# Altium PCB PCB.PcbDoc
Units mm, origin at the board's own origin, x right, y up, seen from the top; angles counter-clockwise.
Board outline 56 x 87.1 mm, 2 copper layers (Top Layer, Bottom Layer); 120 components, 78 nets, 367 pads, 158 vias.
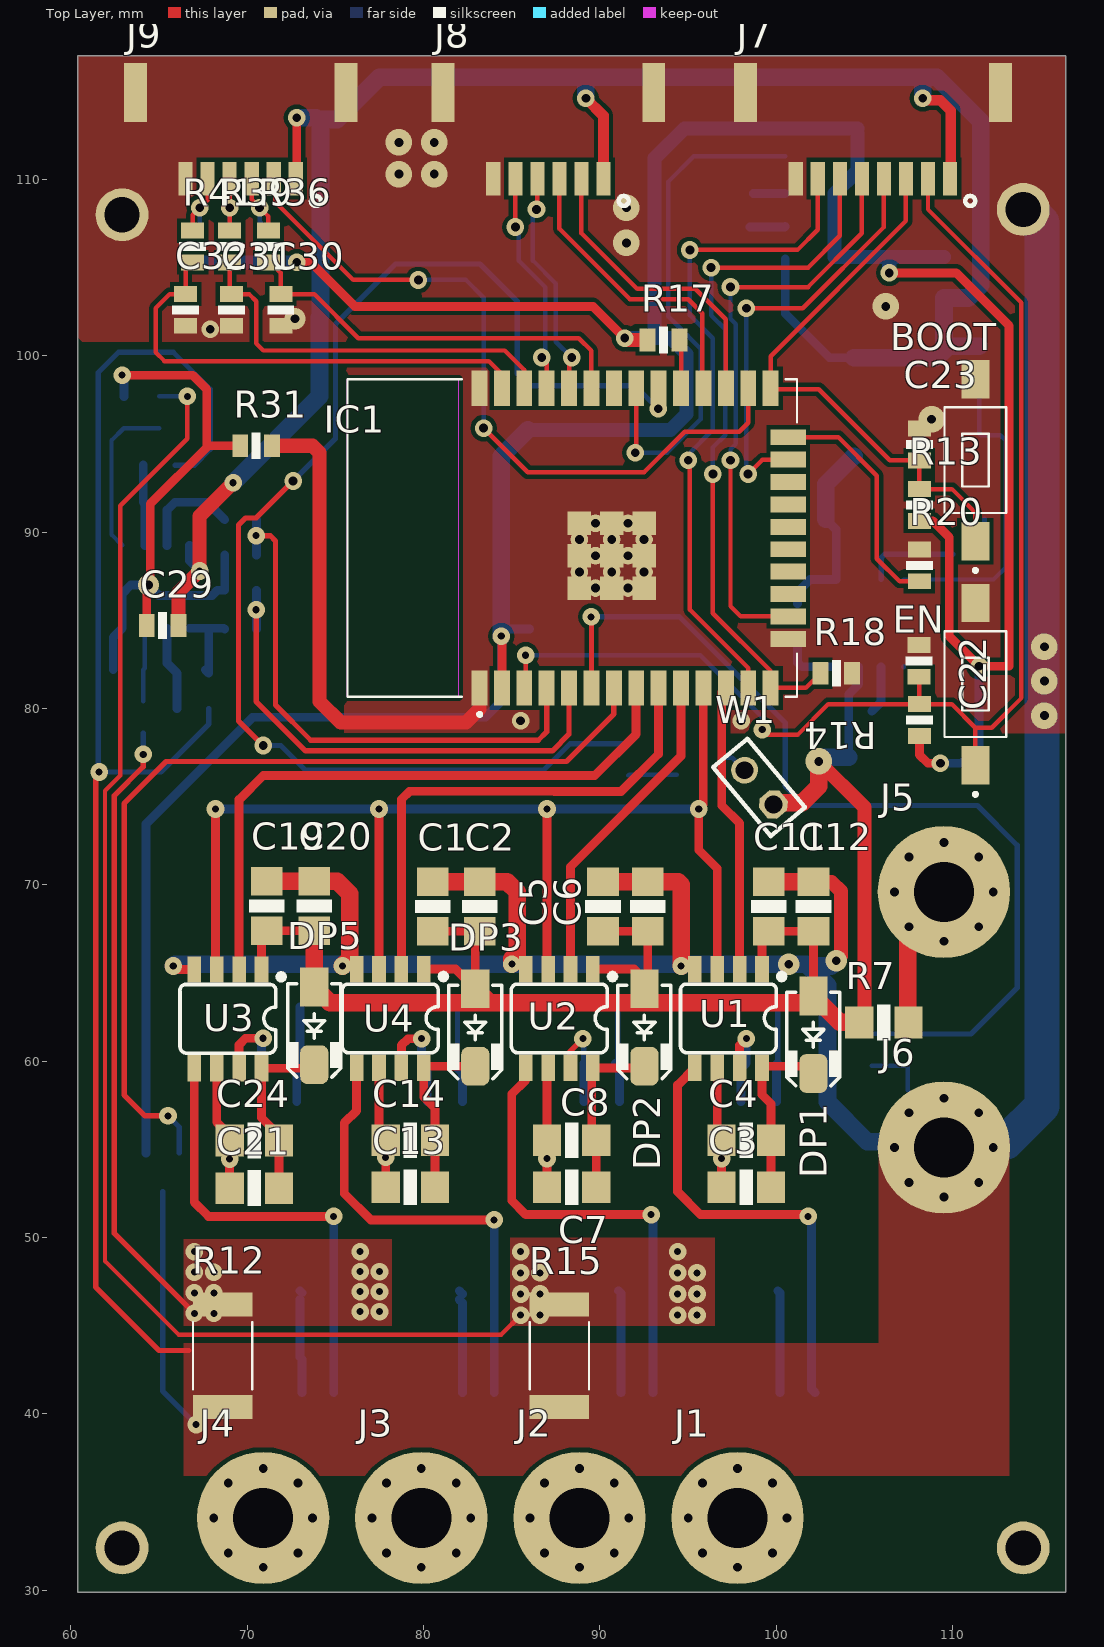
[diagram p0: Top Layer view]
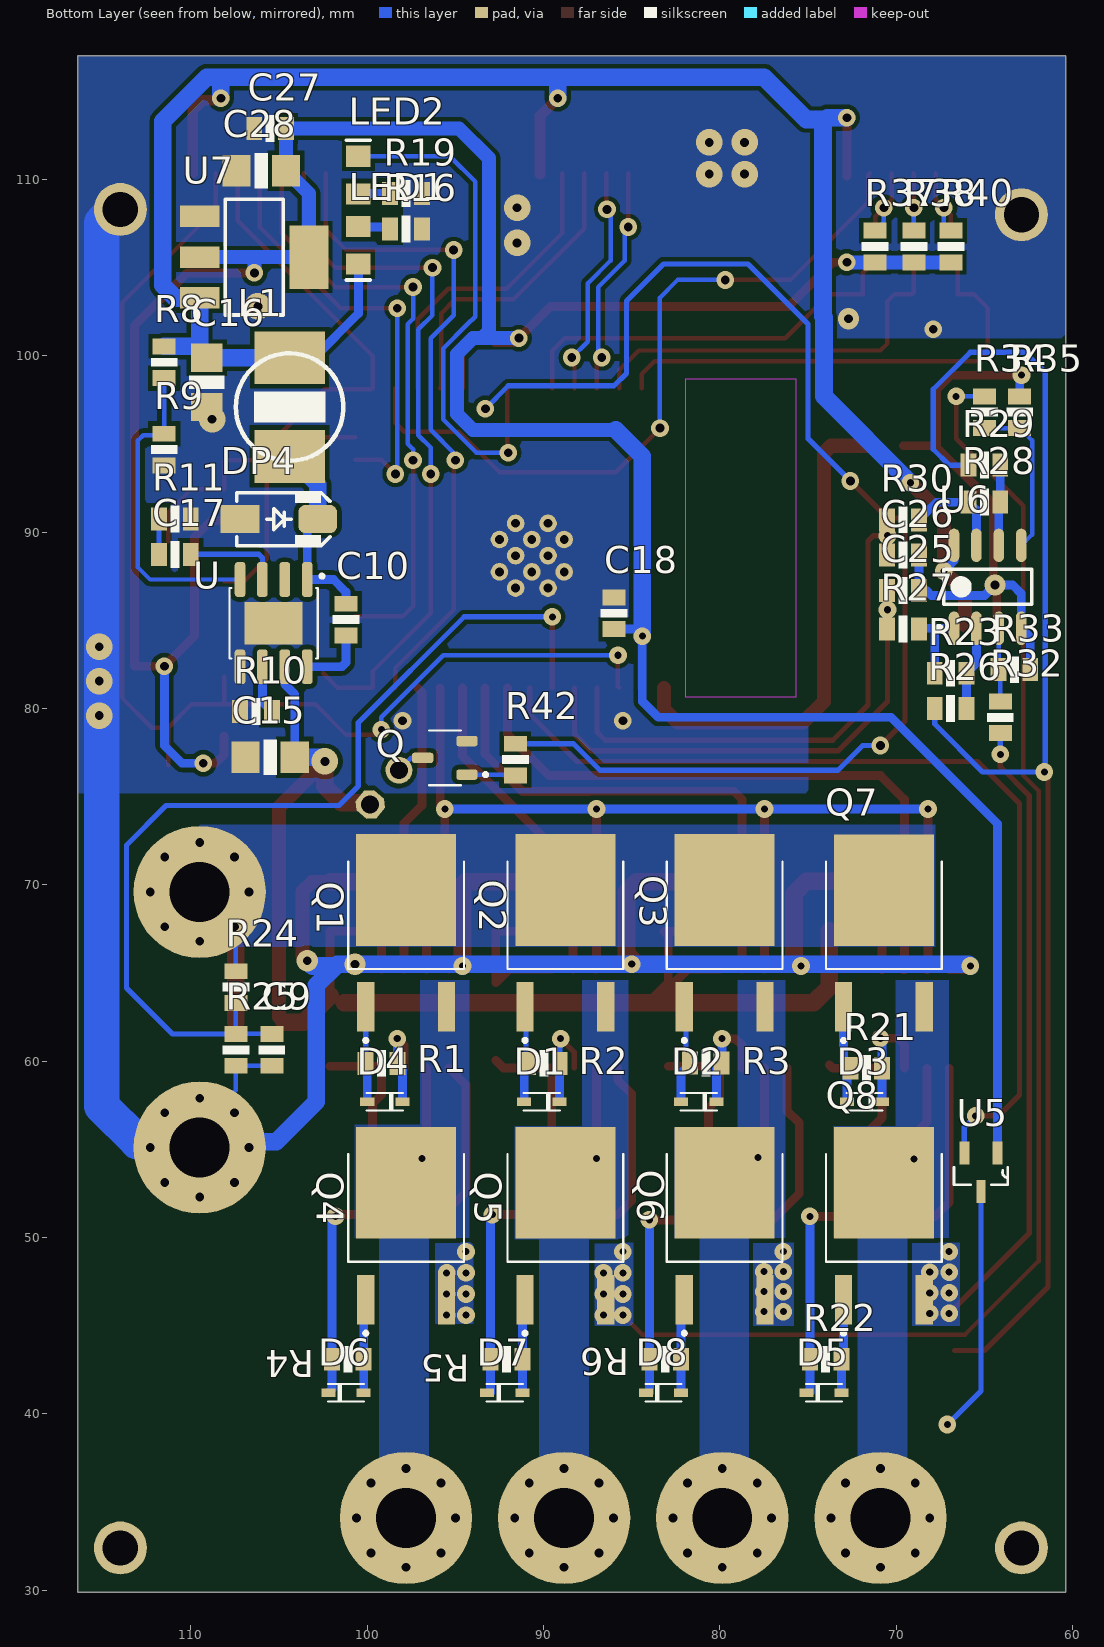
[diagram p1: Bottom Layer view, seen from below]

## Layer stack, top to bottom
Top Solder: solder mask 0.0102, Solder Resist, Dk 3.5
Top Layer: signal copper 0.0356
Dielectric 1: dielectric 0.32, FR-4, Dk 4.8
Bottom Layer: signal copper 0.0356
Bottom Solder: solder mask 0.0102, Solder Resist, Dk 3.5

## Board outline
60.4,29.9 60.4,117 116.4,117 116.4,29.9

## Design rules (kind name [scope] priority, off if disabled: settings)
Clearance [All] p1: gap=0.254 ignorepadtopadclearanceinfootprint=FALSE except(0: Arc-Hole Track-Hole SMDPad-Hole THPad-Hole Via-Hole Fill-Hole Poly-Hole Region-Hole Text-Hole)
PolygonConnect [All] p1: connectstyle=Direct reliefconductorwidth=0.254 reliefentries=4 polygonreliefangle="90 Angle" airgapwidth=0.254
RoutingVias [All] p1: holewidth=0.711 width=1.27 viastyle="Through Hole" minholewidth=0.711 minwidth=1.27 maxholewidth=0.711 maxwidth=1.27
SolderMaskExpansion [All] p1: expansion=0.102
Width [All] p1: maxlimit=4 minlimit=0.254 preferedwidth=0.3
30 further rules are at their usual default settings.

## Classes and differential pairs
component class power: C1 C2 C3 C4 C5 C6 C7 C8 C10 C11 C12 C13 C14 C15 C16 C17 C19 C20 C21 C24 C25 C26 C27 C28 C29 C? D1 D2 D3 D4 D5 D6 D7 D8 DP1 DP2 DP3 DP4 DP5 J1 J2 J3 J4 J5 J6 L1 LED1 Q1 Q2 Q3 Q4 Q5 Q6 Q7 Q8 Q? R1 R2 R3 R4 R5 R6 R7 R8 R9 R10 R11 R12 R15 R16 R21 R22 R23 R26 R27 R28 R29 R30 R31 R32 R33 R34 R35 R? U U1 U2 U3 U4 U6 U7 UP?
component class mcu: BOOT BOOT? C9 C18 C22 C23 C30 C31 C32 EN EN? IC1 IC? J J7 J8 J9 J10 J11 LED2 Q R13 R14 R17 R18 R19 R20 R24 R25 R36 R37 R38 R39 R40 R41 R42 R? U5 W1

## Components (designator, comment, footprint, x,y, rotation, side; value= is the part's Value field where it differs from the comment)
BOOT "1437566-4" SW_1437566-4 111.288,94.082 r90 top
C1 "Cap" _1206 80.518,68.77 r90 top value=100nF
C2 "Cap" _1206 83.185,68.77 r90 top value=10uF
C3 "Cap" _1206 98.298,52.85 r180 top value=100nF
C4 "Cap" _1206 98.298,55.517 r180 top value=10uF
C5 "Cap" _1206 90.17,68.77 r90 top value=100nF
C6 "Cap" _1206 92.71,68.77 r90 top value=10uF
C7 "Cap" _1206 88.392,52.85 r180 top value=100nF
C8 "Cap" _1206 88.392,55.517 r180 top value=10uF
C9 "Cap" _0805 105.41,60.642 r270 bottom value=100nF
C10 "Cap" _0805 101.207,85.039 r90 bottom value=100nF
C11 "Cap" _1206 99.568,68.77 r90 top value=100nF
C12 "Cap" _1206 102.108,68.77 r90 top value=10uF
C13 "Cap" _1206 79.248,52.85 r180 top value=100nF
C14 "Cap" _1206 79.248,55.517 r180 top value=10uF
C15 "Cap" _1206 105.506,77.239 r0 bottom value=10uF
C16 "Cap" _1206 109.099,98.491 r270 bottom value=10uF
C17 "Cap" _0805 110.906,88.739 r0 bottom value=150pF
C18 "Cap" _0805 86,85.4 r90 bottom value=100nF
C19 "Cap" _1206 71.1,68.8 r90 top value=100nF
C20 "Cap" _1206 73.8,68.8 r90 top value=10uF
C21 "Cap" _1206 70.4,52.8 r180 top value=100nF
C22 "Cap" _0805 108.1,82.7 r90 top value=100nF
C23 "Cap" _0805 108.113,94.971 r90 top value=100nF
C24 "Cap" _1206 70.4,55.5 r180 top value=10uF
C25 "Cap" _0805 69.619,86.7 r180 bottom value=150pF
C26 "Cap" _0805 69.619,88.7 r180 bottom value=150pF
C27 "Cap" _0805 105.506,112.891 r180 bottom value=100nF
C28 "Cap" _1206 106.007,110.491 r0 bottom value=10uF
C29 "Cap" _0805 65.2,84.7 r0 top value=100nF
C30 "Cap" _0805 71.9,102.6 r270 top value=100pF
C31 "Cap" _0805 69.1,102.6 r270 top value=100pF
C32 "Cap" _0805 66.5,102.6 r270 top value=100pF
D1 "1N4148W" SOD523F 90.1,57.7 r180 bottom
D2 "1N4148W" SOD523F 81.2,57.7 r180 bottom
D3 "1N4148W" SOD523F 71.8,57.7 r180 bottom
D4 "1N4148W" SOD523F 99,57.7 r180 bottom
D5 "1N4148W" SOD523F 74.1,41.2 r0 bottom
D6 "1N4148W" SOD523F 101.2,41.2 r0 bottom
D7 "1N4148W" SOD523F 92.2,41.2 r0 bottom
D8 "1N4148W" SOD523F 83.2,41.2 r0 bottom
DP1 "1N5819" 430X270D 102.1,61.5 r270 top
DP2 "1N5819" 430X270D 92.519,61.912 r270 top
DP3 "1N5819" 430X270D 82.931,61.912 r270 top
DP4 "1N5819" 430X270D 105.007,90.739 r180 bottom
DP5 "1N5819" 430X270D 73.8,62 r270 top
EN "1437566-4" SW_1437566-4 111.288,81.382 r90 top
IC1 "ESP32-WROOM-32" MODULE_ESP32-WROOM-32 88.425,89.665 r90 top
J1 "" "M3 Spade Hole" 97.8,34.1 r0 top
J2 "" "M3 Spade Hole" 88.833,34.1 r0 top
J3 "" "M3 Spade Hole" 79.867,34.1 r0 top
J4 "" "M3 Spade Hole" 70.9,34.1 r0 top
J5 "" "M3 Spade Hole" 109.5,69.6 r0 top
J6 "" "M3 Spade Hole" 109.5,55.1 r0 top
J7 "I2C/SPI" JST_FH_8P 109.85,110.05 r180 top
J8 "UART" JST_FH_6P 90.2,110.05 r180 top
J9 "HALL/ENCODER" JST_FH_6P 72.75,110.05 r180 top
L1 "Inductor" _INDUCTOR-SMD-6.0mm 104.4,97.094 r90 bottom value=10uH
LED1 "LED" _LED-0805 100.5,106.319 r270 bottom
LED2 "LED" _LED-0805 100.5,110.2 r90 bottom
Q "AO3400A" SOT95P280X125-3N 95.6,77.2 r0 bottom
Q1 "FILL_FOOTPRINT" TO229P994X240-3N 97.791,67.276 r90 bottom
Q2 "FILL_FOOTPRINT" TO229P994X240-3N 88.761,67.276 r90 bottom
Q3 "FILL_FOOTPRINT" TO229P994X240-3N 79.73,67.276 r90 bottom
Q4 "FILL_FOOTPRINT" TO229P994X240-3N 97.791,50.669 r90 bottom
Q5 "FILL_FOOTPRINT" TO229P994X240-3N 88.761,50.669 r90 bottom
Q6 "FILL_FOOTPRINT" TO229P994X240-3N 79.73,50.669 r90 bottom
Q7 "FILL_FOOTPRINT" TO229P994X240-3N 70.7,67.27 r90 bottom
Q8 "FILL_FOOTPRINT" TO229P994X240-3N 70.7,50.67 r90 bottom
R1 "Resistor" _0805 99.187,59.88 r180 bottom value=10R
R2 "Resistor" _0805 89.98,59.88 r180 bottom value=10R
R3 "Resistor" _0805 80.8,59.9 r180 bottom value=10R
R4 "Resistor" _0805 101.1,43.1 r0 bottom value=10R
R5 "Resistor" _0805 92.1,43.1 r0 bottom value=10R
R6 "Resistor" _0805 83.1,43.1 r0 bottom value=10R
R7 "Resistor" _1206 106.1,62.2 r180 top value=0
R8 "Resistor" _0805 111.512,99.634 r90 bottom value=100K
R9 "Resistor" _0805 111.512,94.681 r90 bottom value=100K
R10 "Resistor" _0805 106.307,79.839 r180 bottom value=100K
R11 "Resistor" _0805 110.906,90.739 r0 bottom value=100K
R12 "500u" RESC6332X64N 68.6,43.3 r90 top
R13 "Resistor" _0805 108.113,91.542 r270 top value=4.7K
R14 "Resistor" _0805 108.113,79.35 r270 top value=4.7K
R15 "500u" RESC6332X64N 87.7,43.3 r90 top
R16 "Resistor" _0805 97.8,107.2 r180 bottom value=220
R17 "Resistor" _0805 93.6,100.9 r180 top value=4.7K
R18 "Resistor" _0805 103.4,82 r180 top value=4.7K
R19 "Resistor" _0805 97.8,109.2 r180 bottom value=220
R20 "Resistor" _0805 108.113,88.113 r90 top value=4.7K
R21 "Resistor" _0805 71.7,59.6 r180 bottom value=10R
R22 "Resistor" _0805 74,43.1 r0 bottom value=10R
R23 "Resistor" _0805 66.919,82 r180 bottom value=100K
R24 "Resistor" _0805 107.442,64.198 r90 bottom value=4.7K
R25 "Resistor" _0805 107.442,60.642 r90 bottom value=4.7K
R26 "Resistor" _0805 66.919,80 r0 bottom value=100K
R27 "Resistor" _0805 69.619,84.5 r180 bottom value=100K
R28 "Resistor" _0805 65,91.7 r180 bottom value=100K
R29 "Resistor" _0805 65,93.8 r0 bottom value=100K
R30 "Resistor" _0805 69.619,90.7 r180 bottom value=100K
R31 "Resistor" _0805 70.5,94.9 r180 top value=0
R32 "Resistor" _0805 64.1,79.5 r270 bottom value=100K
R33 "Resistor" _0805 63.3,82.2 r180 bottom value=100K
R34 "Resistor" _0805 65,96.8 r90 bottom value=100K
R35 "Resistor" _0805 63,96.8 r90 bottom value=100K
R36 "Resistor" _0805 71.2,106.2 r90 top value=1K
R37 "Resistor" _0805 71.2,106.2 r270 bottom value=4.7K
R38 "Resistor" _0805 69,106.2 r90 bottom value=4.7K
R39 "Resistor" _0805 69,106.2 r90 top value=1K
R40 "Resistor" _0805 66.9,106.2 r90 bottom value=4.7K
R41 "Resistor" _0805 66.9,106.2 r90 top value=1K
R42 "Resistor" _0805 91.6,77.1 r90 bottom value=1K
U "MP1584EN" SOIC127P600X170-9N 105.307,84.839 r270 bottom
U1 "IR2104" _SO08 97.282,62.42 r180 top
U2 "IR2104" _SO08 87.694,62.42 r180 top
U3 "IR2104" _SO08 68.9,62.4 r180 top
U4 "IR2104" _SO08 78.105,62.42 r180 top
U5 "MCP9700T-E/TT" SOT95P237X112-3N 65.2,53.7 r270 bottom
U6 "LM358D" D008_L 64.819,86.9 r90 bottom
U7 "3.3V" _SOT223 106.407,105.592 r270 bottom
W1 "Jumper" My_IDC-2 94.775,70.327 r40 top

## Footprints (in the part's own frame and the unit in brackets; to place one, negate y for a bottom-side part, rotate by r counter-clockwise, add the part's x,y. Pads: shape width x height; smd on the part's side, far side on the other; paste and mask are expansions set on the pad)
430X270D [mm] "SMA Molded Diode, 2-Leads, Body 4.3x2.7mm"
  rect 2.2x1.6 smd: 1(-2.2,0)
  rrect50% 2.2x1.6 smd: 2(2.2,0)
  silkscreen extent -2.4,-1.5 2.9,1.5, body extent -2.75,-1.4 2.75,1.4, height 2.6
_0805 [mm]
  rect 0.9x1.3 smd: 1(-0.9,0) 2(0.9,0)
  silkscreen extent -0.25,-0.76 0.25,0.76
_1206 [mm]
  rect 1.6x1.8 smd: 1(-1.4,0) 2(1.4,0)
  silkscreen extent -0.38,-1.02 0.38,1.02
_INDUCTOR-SMD-6.0mm [mm]
  rect 3x4 smd: 1(-2.794,0) 2(2.794,0)
  silkscreen extent -3.05,-3.05 3.05,3.05
_LED-0805 [mil]
  rect 47.24x55.12 smd: A(-40,0) K(44.06,0)
  silkscreen extent 79,-27 79,27
_SO08 [mm]
  rect 0.77x1.5 smd: 1(-1.905,-2.8) 2(-0.635,-2.8) 3(0.635,-2.8) 4(1.905,-2.8) 5(1.905,2.8) 6(0.635,2.8) 7(-0.635,2.8) 8(-1.905,2.8)
  silkscreen extent -3.33,-2.7 2.72,1.95
_SOT223 [mil]
  rect 48x88 smd: 1(-91,-122) 2(0,-122) 3(91,-122)
  rect 141.73x86.61 smd: 4(0,122.01)
  silkscreen extent -129,-65 129,65
D008_L [mm] "SOIC, 8-Leads, Body 4.9x3.9mm, Pitch 1.27mm, IPC High Density"
  oval 1.9x0.6 smd: 1(-2.35,1.905) 2(-2.35,0.635) 3(-2.35,-0.635) 4(-2.35,-1.905) 5(2.35,-1.905) 6(2.35,-0.635) 7(2.35,0.635) 8(2.35,1.905)
  silkscreen extent -2.47,-2.5 1,2.88, body extent -2,-2.5 2,2.5, height 1.75
JST_FH_6P [mm]
  rect 0.8x1.6 smd: 1(0,0)
  rect 0.8x1.9 smd: 1(0,0) 2(1.25,0) 3(2.5,0) 4(3.75,0) 5(5,0) 6(6.25,0)
  rect 1.3x3.35 smd: b1(-2.85,-4.875) b2(9.1,-4.875)
  silkscreen extent -1.43,0.99 -0.86,1.55
JST_FH_8P [mm]
  rect 0.8x1.9 smd: 1(0,0) 2(1.25,0) 3(2.5,0) 4(3.75,0) 5(5,0) 6(6.25,0) 7(7.5,0) 8(8.75,0)
  rect 0.8x1.6 smd: 1(0,0)
  rect 1.3x3.35 smd: b1(-2.85,-4.875) b2(11.6,-4.875)
  silkscreen extent -1.43,0.99 -0.86,1.55
"M3 Spade Hole" [mm]
  round 7.5 hole 3.4: 1(0,0)
MODULE_ESP32-WROOM-32 [mm]
  rect 2x0.9 smd: 1(-8.5,5.26) 2(-8.5,3.99) 3(-8.5,2.72) 4(-8.5,1.45) 5(-8.5,0.18) 6(-8.5,-1.09) 7(-8.5,-2.36) 8(-8.5,-3.63) 9(-8.5,-4.9) 10(-8.5,-6.17) 11(-8.5,-7.44) 12(-8.5,-8.71) 13(-8.5,-9.98) 14(-8.5,-11.25) 25(8.5,-11.25) 26(8.5,-9.98) 27(8.5,-8.71) 28(8.5,-7.44) 29(8.5,-6.17) 30(8.5,-4.9) 31(8.5,-3.63) 32(8.5,-2.36) 33(8.5,-1.09) 34(8.5,0.18) 35(8.5,1.45) 36(8.5,2.72) 37(8.5,3.99) 38(8.5,5.26)
  rect 0.9x2 smd: 15(-5.715,-12.25) 16(-4.445,-12.25) 17(-3.175,-12.25) 18(-1.905,-12.25) 19(-0.635,-12.25) 20(0.635,-12.25) 21(1.905,-12.25) 22(3.175,-12.25) 23(4.445,-12.25) 24(5.715,-12.25)
  rect 1.33x1.33 smd: 39_1(-2.835,-0.405) 39_2(-1,-0.405) 39_3(0.835,-0.405) 39_4(-2.835,-2.24) 39_5(-1,-2.24) 39_6(0.835,-2.24) 39_7(-2.835,-4.075) 39_8(-1,-4.075) 39_9(0.835,-4.075)
  round 1 hole 0.5: 39_10(-1.917,-0.405) 39_11(-0.082,-0.405) 39_12(-2.835,-1.322) 39_13(-1,-1.322) 39_14(0.835,-1.322) 39_15(-1.917,-2.24) 39_16(-0.082,-2.24) 39_17(-2.835,-3.157) 39_18(-1,-3.157) 39_19(0.835,-3.157) 39_20(-1.917,-4.075) 39_21(-0.082,-4.075)
  Keep-Out Layer region: 9,6.45 -9,6.45 -9,12.75 9,12.75
  Keep-Out Layer region: 9,6.45 -9,6.45 -9,12.75 9,12.75
  silkscreen extent -10.1,-12.75 9,12.75, body extent -9,-12.75 9,12.75, height 3.2
My_IDC-2 [mil]
  oct 60x60 hole 40: 1(259.5,-0.5)
  round 60 hole 40: 2(259.5,99.5)
  silkscreen extent 209,-51 309,150
RESC6332X64N [mm]
  rect 1.36x3.38 smd: 1(-2.909,0) 2(2.909,0)
  silkscreen extent -1.91,-1.68 1.91,1.68
SOD523F [mm]
  rect 0.8x0.5 smd: 1(-1,0) 2(1,0)
  silkscreen extent -1.02,-0.5 1.02,0.5, body extent -1.82,-0.78 1.83,0.77, height 0.8
SOIC127P600X170-9N [mm]
  rrect54% 1.97x0.6 smd: 1(-2.475,1.905) 2(-2.475,0.635) 3(-2.475,-0.635) 4(-2.475,-1.905) 5(2.475,-1.905) 6(2.475,-0.635) 7(2.475,0.635) 8(2.475,1.905)
  rect 2.41x3.3 smd paste-3: 9(0,0)
  silkscreen extent -2.77,-2.5 2,2.84
SOT95P237X112-3N [mil]
  rect 52x22 smd: 1(-43,37) 2(-43,-37)
  rect 52x20 smd: 3(43,0)
  silkscreen extent -11,-60 28,60
SOT95P280X125-3N [mm]
  rrect50% 1.21x0.59 smd: 1(-1.255,0.95) 2(-1.255,-0.95) 3(1.255,0)
  silkscreen extent -2.41,-1.55 0.9,1.55
SW_1437566-4 [mm]
  rect 2.18x1.6 smd: 1(-4.6,0) 2(4.6,0)
  silkscreen extent -6.35,-1.75 3,1.75
TO229P994X240-3N [mm]
  rect 6.33x5.67 smd paste-4: D(2.43,0)
  rect 2.81x0.98 smd: G(-4.19,2.29) S(-4.19,-2.29)
  silkscreen extent -6.19,-3.28 4.06,3.28

## Part data
BOOT EN: "Switch Tactile OFF _ON_ SPST Rectangular Button Gull Wing 0.05A 12VDC 1.77N SMD T/R", Contact_Current_Rating="50 mA", Package=None, Configuration_Pole-Throw="Single Pole - Single Throw", Digi-Key_Part_Number=450-1758-1-ND, Digi-Key_Purchase_URL=https://www.digikey.com/product-detail/en/te-connectivity-alcoswitch-switches/FSMSMTR/450-1758-1-ND/2271637?utm_source=snapeda&utm_medium=aggregator&utm_campaign=symbol, MF="TE Connectivity", MP=FSMSMTR, SnapEDA_Link=https://www.snapeda.com/parts/FSMSMTR/TE%20Connectivity%20ALCOSWITCH%20Switches/view-part/2118497/?ref=snap, TE_purchase_URL=https://www.te.com/usa-en/product-1437566-4.html?te_bu=Cor&te_type=disp&te_campaign=seda_glo_cor-seda-global-disp-prtnr-fy19-seda-model-bom-cta_sma-317_1&elqCampaignId=32493
C1 C2 C3 C4 C5 C6 C7 C8 C9 C10 C11 C12 C13 C14 C15 C16 C17 C18 C19 C20 C21 C22 C23 C24 C25 C26 C27 C28 C29 C30 C31 C32: library part Cap_1
D1 D2 D3 D4 D5 D6 D7 D8: "DIODE, HIGH SPEED, SOD-123F; Diode Type:Small Signal; Voltage, Vrrm:75V; Current, If AV:10mA; Voltage, Vf Max:1V; Temperature, Tj Max:150°C; Termination Type:SMD; Case Style:SOD-123F; No. of Pins:2; Current, If Vf:100mA; Current, Ifrm:300mA; Current, Ifs Max:2A; Power, Ptot:400mW; Temperature, Tj Min:-65°C; Time, trr Max:4ns", Package="SOD-123 Multicomp", Availability="In Stock", Check_prices=https://www.snapeda.com/parts/1N4148W/Micro%20Commercial/view-part/134617/?ref=eda, MF="Micro Commercial", MP=1N4148W, Price=None, SnapEDA_Link=https://www.snapeda.com/parts/1N4148W/Micro%20Commercial/view-part/134617/?ref=snap
DP1 DP2 DP3 DP4 DP5: "Schottkey Rectifiers", Data=16-12-2016, Designer="Abbas Basereh"
IC1: "Bluetooth, WiFi 802.11b/g/n, Bluetooth v4.2 +EDR, Class 1, 2 and 3 Transceiver Module 2.4GHz ~ 2.5GHz Antenna Not Included, U.FL Surface Mount", Package="Module Espressif Systems", Check_prices=https://www.snapeda.com/parts/ESP32-WROOM-32/Espressif+Systems/view-part/?ref=eda, Digi-Key_Part_Number=1965-ESP32-WROOM-32U-N4CT-ND, MF="Espressif Systems", MP=ESP32-WROOM-32, Purchase-URL=https://pricing.snapeda.com/search/part/ESP32-WROOM-32/?ref=eda, SnapEDA_Link=https://www.snapeda.com/parts/ESP32-WROOM-32/Espressif+Systems/view-part/?ref=snap
J1 J2 J3 J4 J5 J6: library part "M3 Spade Terminal", "M3 Spade Terminal"
J7: library part JST_FH_8P
J8 J9: library part JST_FH_6P
Q: "N-Channel 30V 5.7A _Ta_ 1.4W _Ta_ Surface Mount SOT-23-3L", Package="SOT-23 Alpha &amp; Omega Semiconductor", Availability=Unavailable, MF="Alpha &", MP=AO3400A, Price=None, SnapEDA_Link=https://www.snapeda.com/parts/AO3400A/Alpha%20%26%20Omega%20Semiconductor%20Inc./view-part/405248/?ref=snap
Q1 Q2 Q3 Q4 Q5 Q6 Q7 Q8: library part NTMFS4935NT1G, "MOSFET N-CH 30V 13A SO8FL", Current - Continuous Drain (Id) @ 25°C="13A (Ta), 93A (Tc)", Drain to Source Voltage (Vdss)=30V, Drive Voltage (Max Rds On,  Min Rds On)="4.5V, 10V", Input Capacitance (Ciss) (Max) @ Vds="4850pF @ 15V", Manufacturer="ON Semiconductor", Operating Temperature="-55°C ~ 150°C (TJ)", Package / Case="8-PowerTDFN, 5 Leads", Power Dissipation (Max)="930mW (Ta), 48W (Tc)", Supplier Device Package="5-DFN (5x6) (8-SOFL)", Supplier Part Number 1=NTMFS4935NT1GOSCT-ND, Category="Discrete Semiconductor Products", ComponentLink1Description=http://www.onsemi.com/pub_link/Collateral/NTMFS4935N-D.PDF, ComponentLink1URL=http://www.onsemi.com/pub_link/Collateral/NTMFS4935N-D.PDF, FET Feature=-, FET Type=N-Channel, Gate Charge (Qg) (Max) @ Vgs="49.4nC @ 10V", Manufacturer Part Number=NTMFS4935NT1G, Mounting Type="Surface Mount", Packaging="Cut Tape (CT)", Part Status=Active, Pricing 1="1=0.61, 10=0.541, 100=0.4145, 500=0.3277 (USD)", Rds On (Max) @ Id, Vgs="3.2 mOhm @ 30A, 10V", RoHS="RoHS Compliant", Stock 1=932, Supplier 1=Digi-Key, Technology="MOSFET (Metal Oxide)", Vgs (Max)=±20V, Vgs(th) (Max) @ Id="2.2V @ 250µA"
R12 R15: library part Y162820K0000D0W, Package=None, Availability=Unavailable, MP=Y162820K0000D0W, Price=None
U: "Buck Switching Regulator IC Positive Adjustable 0.8V 1 Output 3A 8-SOIC _0.154, 3.90mm Width_ Exposed Pad", Package="SOIC-8 Monolithic Power", Availability=Unavailable, MF="Monolithic Power", MP=MP1584EN, Price=None, SnapEDA_Link=https://www.snapeda.com/parts/MP1584EN/Monolithic%20Power%20Systems%20Inc./view-part/891721/?ref=snap
U5: "Temperature Sensor Analog, Local -40°C ~ 125°C 10mV/°C SOT-23-3", Package="SOT-23-3 Microchip", Availability=Unavailable, MF=Microchip, MP=MCP9700T-E/TT, Price=None, SnapEDA_Link=https://www.snapeda.com/parts/MCP9700T-E/TT/Microchip/view-part/134539/?ref=snap
U6: "Dual Operational Amplifier", Code_IPC=SOIC127P600-8, ComponentLink1Description="Manufacturer Link", ComponentLink1URL=http://www.ti.com/, ComponentLink2Description=Datasheet, ComponentLink2URL=http://www-s.ti.com/sc/ds/lm358.pdf, DatasheetVersion=Jul-1998, LatestRevisionDate=13-Apr-2006, LatestRevisionNote="IPC-7351 Footprint Added.", PackageDescription="8-Pin Small Outline Integrated Circuit 1.27 mm Pitch", PackageReference=D008, PackageVersion=Jan-1998, Published=16-Jan-2001, Publisher="Altium Limited"
U7: library part LD1117
W1: "Jumper Wire", Manufacturer="Generic Components", Published=1999
LED1 LED2: PROD_ID=DIO-09955

## Free pads (board coordinates)
  round 3 hole 2: ""(62.9,32.4) ""(62.9,108) ""(114,32.4) ""(114,108.3)

## Via types
v1: diameter 1, hole 0.5, Top Layer to Bottom Layer, 80 vias
v2: diameter 1, hole 0.4, Top Layer to Bottom Layer, 62 vias
v3: diameter 1.5, hole 0.5, Top Layer to Bottom Layer, 12 vias
v4: diameter 1.2, hole 0.5, Top Layer to Bottom Layer, 4 vias

## Nets (pads, with @x,y where several pads share a name; then routed paths per layer and width w, separated by ;. In a path a pad name is that pad's centre, name@x,y a point inside that pad or via, vN(x,y) a via of type N, cw(c..) or ccw(c..) an arc to the next point about the centre after c; other vN are vias at no path point)
3V3: C18.1 C27.2 C28.1 IC1.2 R13.2 R14.2 R17.2 R37.2 R38.1 R40.1 U5.1 U7.2 U7.4 | length 192.6
  Top Layer w0.5: v1(72.8,105.3) 73.6,105.3 76.1,102.8 89.6,102.8 v1(91.4,101) ; v2(84.4,84.1) 84.435,84.065 IC1.2 ; v1(106.4,104.7) 110.2,104.7 113.2,101.7 113.2,82.4 v1(111.5,82.4) 109.8,84.1 109.8,89.7 108.858,90.642 R13.2 ; R14.2 108.113,77.387 108.6,76.9 v1(109.3,76.9)
  Top Layer w0.8: v1(91.4,101) 91.5,100.9 R17.2
  Bottom Layer w0.5: U5.1 64.26,73.46 70.3,79.5 83.5,79.5 84.4,80.4 v2(84.4,84.1) 84.8,84.5 C18.1 ; v1(109.3,76.9) 110.5,76.9 111.5,77.9 v1(111.5,82.4)
  Bottom Layer w0.8: R40.1 R38.1 R37.2 v1(72.8,105.3) ; 85.9,95.8 94,95.8 94.9,96.7 94.9,100.1 94,101 93.5,101 ; v1(91.4,101) 93.5,101 ; C27.2@104.606,112.6 C28.1 103.308,109.193 U7.4 106.4,105.592 ; C27.2 94.791,112.891 93.1,111.2 93.1,101.4 93.5,101 ; v1(106.4,104.7) 106.4,105.592 ; U7.2 106.4,105.592
  Bottom Layer w1: v2(84.4,84.1) 84.4,94.3 85.9,95.8
+5V: C16.1 C29.2 J7.1 J8.1 J9.1 L1.2 LED1.K R8.2 U6.8 U7.3 | length 120.7
  Top Layer w0.5: J9.1@72.8,110.2 v1(72.8,113.5) ; v1@108.2,114.5 v1(108.3,114.6)
  Top Layer w0.6: v1(89.2,114.6) 90.2,113.6 J8.1@90.2,110.3 ; v1@108.2,114.5 109.3,114.5 109.9,113.9 J7.1@109.9,110.35
  Top Layer w0.8: C29.2 66.1,86.6 v2(67.3,87.8) 67.3,90.9 v2(69.2,92.8)
  Bottom Layer w0.5: U6.8 66.724,88.376 v2(67.3,87.8) ; LED1.K@100.5,105.5 LED1.K 100.5,102.4 103.012,99.888 L1.2
  Bottom Layer w1: v2(69.2,92.8) 74.096,97.696 74.096,102.174 74.154,102.232 74.154,113.246 ; v1(72.8,113.5) 73.9,113.5 74.154,113.246 ; v1(89.2,114.6) 89.2,115.8 ; L1.2 109.096,99.888 C16.1 C16.1@109.505,100.297 ; v1(108.3,114.6) 108.3,115.8 ; R8.2 109.742,100.534 C16.1@109.505,100.297 ; 74.154,113.246 74.308,113.4 75.1,113.4 77.5,115.8 89.2,115.8 ; 89.2,115.8 108.3,115.8 ; 108.3,115.8 109.1,115.8 111.6,113.3 111.6,104 110.88,103.28 U7.3 C16.1@109.505,100.297
+12V: C1.1 C2.1 C5.1 C6.1 C11.1 C12.1 C15.1 C19.1 C20.1 DP1.1 DP2.1 DP3.1 DP5.1 R7.2 U1.1 U2.1 U3.1 U4.1 U.7 W1.1 | length 94.5
  Top Layer w0.5: U3.1 70.805,67.105 C19.1 C20.1 ; U4.1 81.823,65.221 DP3.1 82.931,67.116 C2.1 C1.1 ; U2.1@89.535,65.221 U2.1 91.942,65.221 92.71,64.453 C6.1 C5.1 ; U1.1 99.187,66.989 C11.1 C12.1 DP1.1@102.108,64.113
  Top Layer w0.8: v3(102.4,77) 105,74.4 105,62.5 R7.2
  Top Layer w1: C20.1 DP5.1 74.691,63.309 83.734,63.309 ; DP3.1 83.734,63.309 ; W1.1@99.8,74.66 101.46,74.66 102.4,75.6 v3(102.4,77) ; DP1.1@101.305,63.309 83.734,63.309 ; DP1.1 103.6,62.2 R7.2
  Bottom Layer w0.5: C15.1 104.106,80.806 104.672,81.371 U.7
  Bottom Layer w1: v3(102.4,77) 102.639,77.239 C15.1
AGND: C25.2 C26.2 C29.1 R31.2 R33.2 R35.2 U6.4 | length 36.1
  Top Layer w0.5: v2(62.9,98.9) 66.9,98.9 67.7,98.1 67.7,94.8 ; C29.1 64.3,86.9 v4(64.4,87) 64.5,87 64.5,91.6 67.7,94.8 ; R31.2 67.8,94.9 67.7,94.8
  Bottom Layer w0.5: R33.2 62.4,84.036 U6.4 62.914,86.514 63.4,87 v4(64.4,87) 65,86.4 68,86.4 68.3,86.7 C25.2 C26.2 ; v2(62.9,98.9) 63,98.8 R35.2
"CAN TX": IC1.29 R17.1 | length 2.8
  Top Layer w0.254: R17.1 94.595,100.805 IC1.29
CS: IC1.23 J7.4 | length 24.8
  Top Layer w0.254: v1(98.3,102.7) 101.5,102.7 106.1,107.3 J7.4 J7.4@106.1,110.35 ; v1(98.4,93.3) 99.21,94.11 IC1.23
  Bottom Layer w0.254: v1(98.3,102.7) 98.3,93.4 v1(98.4,93.3)
DCBUS: J5.1 Q1.D Q2.D Q3.D Q7.D R7.1 R24.2 | length 6.4
  Top Layer w1: J5.1@107.442,66.859 107.445,66.856 R7.1@107.445,62.2
  Bottom Layer w0.254: R24.2 J5.1@107.442,66.859
  other v1: 109.5,66.8 107.52,67.62 111.48,67.62 106.7,69.6 112.3,69.6 107.52,71.58 111.48,71.58 109.5,72.4
EN: C22.1 EN.1 IC1.3 J7.2 R14.1 | length 69.9
  Top Layer w0.254: IC1.3 85.8,81.26 85.781,81.279 v2(85.781,83.019) ; v2(99.2,78.8) 99.5,78.5 101.201,78.5 102.951,80.249 R14.1 ; C22.1 108.113,81.787 R14.1 ; J7.2@108.6,110.35 J7.2 108.6,108.3 113.9,103 113.9,80.6 112.212,78.912 111.288,78.912 ; EN.1 111.288,78.912 ; R14.1 109.951,80.249 111.288,78.912
  Bottom Layer w0.254: v2(85.781,83.019) 95.681,83.019 99.2,79.5 v2(99.2,78.8)
FAN: IC1.30 R42.2 | length 74.5
  Top Layer w0.3: v1(70.9,77.9) 69.5,79.3 69.5,90.4 69.9,90.8 70.5,90.8 v1(72.6,92.9)
  Bottom Layer w0.3: v1(70.9,77.9) 71.9,77.9 73.3,76.5 86.8,76.5 88.3,78 R42.2 ; v1(72.6,92.9) 75,95.3 75,101.8 78.404,105.204 83.196,105.204 85.3,103.1 85.3,99 86,98.3 92,98.3 v1(93.3,97)
G_EN: IC1.11 U1.3 U2.3 U3.3 U4.3 | length 71.3
  Top Layer w0.5: v2(68.2,74.3) 68.2,65.265 U3.3 ; U4.3 v2(77.47,74.3) v2@77.47,74.4 ; v2(86.995,74.3) 86.995,65.284 U2.3 ; IC1.11 95.86,81.16 95.86,74.56 v2(95.6,74.3) 95.6,71.977 96.647,70.929 U1.3
  Bottom Layer w0.5: v2(68.2,74.3) v2(77.47,74.3) v2(86.995,74.3) v2(95.6,74.3)
GH_A: D4.2 R1.2 U1.7 | length 5.5
  Top Layer w0.5: U1.7 97.917,60.896 v2(98.298,61.277)
  Bottom Layer w0.5: D4.2 98,59.593 R1.2 98.287,61.267 v2(98.298,61.277)
GH_B: D1.2 R2.2 U2.7 | length 5.6
  Top Layer w0.3: U2.7@88.265,59.62 88.265,60.515 v2(89.027,61.277)
  Bottom Layer w0.3: v2(89.027,61.277) 89.08,61.224 R2.2
  Bottom Layer w0.5: R2.2 89.1,59.861 D1.2
GH_C: D2.2 R3.2 U4.7 | length 6.3
  Top Layer w0.5: U4.7 78.74,60.896 79.121,61.277 v2(79.883,61.277)
  Bottom Layer w0.5: R3.2@79.874,59.88 79.874,61.268 v2(79.883,61.277) ; R3.2 80.2,59.6 D2.2
GH_D: D3.2 R21.2 U3.7 | length 6.5
  Top Layer w0.5: U3.7 69.535,60.935 69.9,61.3 v2(70.9,61.3)
  Bottom Layer w0.5: D3.2 R21.2 70.8,61.2 v2(70.9,61.3)
GL_A: D6.2 R4.2 U1.5 | length 25.8
  Top Layer w0.5: U1.5 94.4,58.643 94.4,52.6 95.7,51.3 101.7,51.3 v2(101.8,51.2)
  Bottom Layer w0.5: v2(101.8,51.2) 101.9,51.2 102,51.3 R4.2 102,41.4 D6.2
GL_B: D7.2 R5.2 U2.5 | length 26.2
  Top Layer w0.5: U2.5 85.788,58.928 85,58.14 85,52.1 85.8,51.3 v2(92.9,51.3)
  Bottom Layer w0.5: v2(92.9,51.3) 93,51.2 R5.2 D7.2@93,41.2
GL_C: D8.2 R6.2 U4.5 | length 26.3
  Top Layer w0.5: U4.5 76.2,57.2 75.5,56.5 75.5,52.5 77,51 v2(84,51)
  Bottom Layer w0.5: D8.2@84,41.2 v2(84,51)
GL_D: D5.2 R22.2 U3.5 | length 25.8
  Top Layer w0.5: U3.5 66.995,52.005 67.8,51.2 v2(74.9,51.2)
  Bottom Layer w0.5: D5.2@74.9,41.2 v2(74.9,51.2)
H1: C30.1 IC1.33 R36.1 | length 23.1
  Top Layer w0.254: R36.1@71.3,105.3 71.9,104.7 C30.1 73.8,103.5 76.3,101 88.8,101 89.515,100.285 IC1.33
H2: C31.1 IC1.36 R39.1 | length 22.7
  Top Layer w0.254: R39.1 69,103.6 C31.1 70.1,103.5 70.5,103.1 70.5,100.7 70.9,100.3 84.6,100.3 85.705,99.195 IC1.36
H3: C32.1 IC1.37 R41.1 | length 27.6
  Top Layer w0.254: R41.1@66.9,105.1 R41.1@67,105.2 ; R41.1 66.5,104.9 C32.1 65.6,103.5 64.8,102.7 64.8,100.2 65.3,99.7 83.7,99.7 84.435,98.965 IC1.37
HALL1: J9.3 R36.2 R37.1 | length 5.2
  Top Layer w0.254: J9.3@70.25,110.35 J9.3 70.25,108.85 v1(70.7,108.4) 71.2,107.9 R36.2
  Bottom Layer w0.254: v1(70.7,108.4) 70.7,107.6 R37.1
HALL2: J9.4 R38.2 R39.2 | length 4.6
  Top Layer w0.254: R39.2 v1(69,108.4) J9.4 J9.4@69,110.35
  Bottom Layer w0.254: R38.2 v1(69,108.4)
HALL3: J9.5 R40.2 R41.2 | length 5.1
  Top Layer w0.254: R41.2 66.9,108 v1(67.3,108.4) 67.75,108.85 J9.5 J9.5@67.75,110.35
  Bottom Layer w0.254: R40.2 67.3,107.5 v1(67.3,108.4)
IO0: BOOT.1 C23.1 IC1.25 J7.3 R13.1 | length 32.5
  Top Layer w0.254: J7.3@107.35,110.35 J7.3 107.35,107.65 99.675,99.975 IC1.25 99.74,98.1 102.4,98.1 106.429,94.071 C23.1 R13.1 109.959,92.441 111.288,91.112 BOOT.1
IO2: IC1.24 R20.1 | length 13.6
  Top Layer w0.254: IC1.24 103.52,95.38 105.7,93.2 105.7,88.5 106.987,87.213 R20.1
LED1: IC1.31 LED2.K | length 29.6
  Top Layer w0.254: v1(92,94.5) 92.055,94.555 IC1.31
  Bottom Layer w0.254: v1(92,94.5) 93.804,94.5 95.7,96.396 95.7,100.404 94.323,101.781 94.319,101.781 93.881,102.219 93.881,109.881 95.319,111.319 LED2.K
MISO: IC1.14 J7.6 R18.2 | length 40.7
  Top Layer w0.254: v1(96.3,105) 101.8,105 103.6,106.8 J7.6 J7.6@103.6,110.35 ; v1(96.4,93.3) 96.4,85.4 99.675,82.125 IC1.14 101.665,81.165 R18.2
  Bottom Layer w0.254: v1(96.4,93.3) 96.4,94.8 97.1,95.5 97.1,101.5 96.3,102.3 v1(96.3,105) v1@96.4,104.9
MOSI: IC1.16 J7.5 | length 34
  Top Layer w0.254: v1(97.4,94.073) 97.4,85.8 97.98,85.22 IC1.16 ; v1(97.4,103.9) 101.8,103.9 104.85,106.95 J7.5 J7.5@104.85,110.35
  Bottom Layer w0.254: v1(97.4,94.073) 97.4,94.7 97.7,95 97.7,101.8 97.4,102.1 v1(97.4,103.9)
MOTOR_TMP: IC1.26 J9.2 | length 42.3
  Top Layer w0.254: J9.2@71.5,110.35 71.581,110.269 71.581,108.719 76,104.3 v1(79.7,104.3) ; v1(83.4,95.9) 85.9,93.4 92.5,93.4 94.8,95.7 97.9,95.7 98.405,96.205 IC1.26
  Bottom Layer w0.254: v1(79.7,104.3) 82.4,104.3 83.4,103.3 v1(83.4,95.9)
NetC3_1: C3.1 C4.1 DP1.2 U1.8 | length 9.6
  Top Layer w0.5: C3.1@99.698,53.149 C4.1 99.698,57.591 99.187,58.102 U1.8 99.279,59.712 DP1.2@102.108,59.712
NetC7_1: C7.1 C8.1 DP2.2 U2.8 | length 9.9
  Top Layer w0.5: C7.1@89.792,53.149 C8.1 89.792,55.689 89.535,55.947 89.535,59.62 U2.8 92.278,59.62 DP2.2@92.71,60.052
NetC10_1: C10.1 U.8 | length 3.8
  Bottom Layer w0.5: C10.1 101.207,82.594 101.436,82.364 U.8
NetC10_2: C10.2 DP4.2 L1.1 U.1 | length 11
  Bottom Layer w0.5: C10.2 101.207,86.606 101.914,87.314 U.1 103.402,90.144 DP4.2
  Bottom Layer w1: DP4.2 102.806,92.706 L1.1
NetC13_1: C13.1 C14.1 DP3.2 U4.8 | length 9.7
  Top Layer w0.5: C13.1@80.648,53.149 C14.1 80.648,57.337 80.01,57.975 U4.8 80.102,59.712 DP3.2
NetC17_1: C17.1 U.3 | length 5.4
  Bottom Layer w0.3: U.3 105.942,88.542 106.139,88.739 C17.1
NetC17_2: C17.2 R11.2 | length 2
  Bottom Layer w0.3: C17.2 R11.2
NetC21_1: C21.1 C24.1 DP5.2 U3.8 | length 10
  Top Layer w0.5: C21.1@71.8,53.1 C24.1 71.8,55.8 70.805,56.795 U3.8 73.6,59.6 DP5.2
NetD1_1: D1.1 Q2.G R2.1 | length 5.5
  Bottom Layer w0.3: R2.1 91.001,60.001 Q2.G@91.001,63.086
  Bottom Layer w0.5: R2.1 91.1,59.661 D1.1
NetD2_1: D2.1 Q3.G R3.1 | length 5.7
  Bottom Layer w0.3: R3.1@81.673,59.88 81.92,60.128 Q3.G@81.92,63.086
  Bottom Layer w0.5: R3.1@81.673,59.88 82.2,59.354 D2.1
NetD3_1: D3.1 Q7.G R21.1 | length 5.6
  Bottom Layer w0.5: D3.1 72.8,59.4 R21.1 72.99,59.99 Q7.G
NetD4_1: D4.1 Q1.G R1.1 | length 5.4
  Bottom Layer w0.3: R1.1@100.081,59.886 Q1.G
  Bottom Layer w0.5: D4.1 100,59.804 R1.1@100.081,59.886
NetD5_1: D5.1 Q8.G R22.1 | length 5.5
  Bottom Layer w0.5: Q8.G 72.99,43.21 R22.1 D5.1@73.1,41.2 ; Q8.G@72.99,46.98 Q8.G@73.1,46.87
NetD6_1: D6.1 Q4.G R4.1 | length 5.8
  Bottom Layer w0.5: Q4.G@100.081,46.979 100.2,46.86 R4.1 D6.1@100.2,41.2
NetD7_1: D7.1 Q5.G R5.1 | length 5.8
  Bottom Layer w0.5: Q5.G@91.051,46.979 91.2,46.829 R5.1 D7.1@91.2,41.2
NetD8_1: D8.1 Q6.G R6.1 | length 5.6
  Bottom Layer w0.5: Q6.G 82.2,46.299 R6.1 D8.1@82.2,41.2 ; Q6.G@82.02,46.979 Q6.G@82.2,46.799
NetLED1_A: LED1.A R16.1 | length 2
  Bottom Layer w0.5: R16.1@98.5,107.3 100.465,107.3 LED1.A
NetLED2_A: LED2.A R19.1 | length 1.8
  Bottom Layer w0.5: R19.1 100.484,109.2 LED2.A
NetQ_1: Q.1 R42.1 | length 2.8
  Bottom Layer w0.254: R42.1 91.65,76.25 Q.1
NetQ_3: Q.3 W1.2 | length 1.6
  Bottom Layer w0.254: Q.3 97.5,77.2 W1.2
NetR8_1: R8.1 R9.2 U.4 | length 18.1
  Bottom Layer w0.254: U.4 112.314,87.314 113,88 113,95.2 112.7,95.5 111.593,95.5 R9.2 R8.1
NetR10_2: R10.2 U.6 | length 2.7
  Bottom Layer w0.5: R10.2 105.942,80.374 U.6
NetR23_1: R23.1 R27.2 U6.1 | length 4.8
  Bottom Layer w0.5: U6.1 67.8,84.55 ; R23.1@67.624,82.195 R23.1 67.819,84.531 67.8,84.55 ; R27.2 68.669,84.55 67.8,84.55
NetR23_2: R23.2 R26.1 U6.2 | length 4.8
  Bottom Layer w0.5: U6.2 65.454,82.565 R23.2 R26.1
NetR28_1: R28.1 R30.2 U6.7 | length 5.9
  Bottom Layer w0.5: U6.7 65.454,91.254 R28.1 67.719,91.7 R30.2
NetR28_2: R28.2 R29.1 U6.6 | length 4.6
  Bottom Layer w0.5: R29.1 R28.2 64.184,91.616 U6.6
NetR32_1: R32.1 R33.1 U6.3 | length 4.2
  Bottom Layer w0.254: R32.1 64.1,82.2 64.184,82.284 U6.3
NetR34_1: R34.1 R35.1 U6.5 | length 9.2
  Bottom Layer w0.254: U6.5 62.3,89.864 62.3,95.2 R35.1 R34.1
PHA: C3.2 C4.2 J1.1 Q1.S Q4.D U1.6 | length 6.6
  Top Layer w0.5: U1.6 96.647,56.067 96.898,55.816 C4.2 v2(96.898,54.483) C3.2@96.898,53.149
  other v1: 97.8,31.3 95.82,32.12 99.78,32.12 95,34.1 100.6,34.1 95.82,36.08 99.78,36.08 97.8,36.9
PHB: C7.2 C8.2 J2.1 Q2.S Q5.D U2.6 | length 6.5
  Top Layer w0.5: C7.2@86.992,53.149 v2(86.992,54.483) C8.2 86.992,59.617 U2.6@86.995,59.62
  other v1: 88.833,31.3 86.853,32.12 90.813,32.12 86.033,34.1 91.633,34.1 86.853,36.08 90.813,36.08 88.833,36.9
PHC: C13.2 C14.2 J3.1 Q3.S Q6.D U4.6 | length 6.6
  Top Layer w0.5: U4.6 77.47,56.194 77.848,55.816 C14.2 v2(77.848,54.546) C13.2@77.848,53.149
  other v1: 79.867,31.3 77.887,32.12 81.847,32.12 77.067,34.1 82.667,34.1 77.887,36.08 81.847,36.08 79.867,36.9
PHD: C21.2 C24.2 J4.1 Q7.S Q8.D U3.6 | length 6.8
  Top Layer w0.5: U3.6 68.265,56.535 69,55.8 C24.2 v2(69,54.45) C21.2@69,53.1
  other v1: 70.9,31.3 68.92,32.12 72.88,32.12 68.1,34.1 73.7,34.1 68.92,36.08 72.88,36.08 70.9,36.9
PWMA: IC1.12 U1.2 | length 16.5
  Top Layer w0.5: IC1.12 96.9,80.93 96.9,74.5 97.917,73.483 U1.2
PWMB: IC1.10 U2.2 | length 18.5
  Top Layer w0.5: U2.2 88.328,71.028 94.59,77.29 94.59,81.16 IC1.10
PWMC: IC1.9 U4.2 | length 29
  Top Layer w0.5: U4.2 78.74,74.84 79.204,75.304 87.411,75.304 87.415,75.3 91.2,75.3 93.32,77.42 93.32,81.16 IC1.9
PWMD: IC1.8 U3.2 | length 36.4
  Top Layer w0.5: U3.2@69.6,65.2 U3.2 69.535,74.835 70.9,76.2 89.7,76.2 92.05,78.55 92.05,81.16 IC1.8
RXD0: IC1.34 J8.4 | length 13.3
  Top Layer w0.254: v1(86.4,108.3) 86.45,108.35 J8.4 J8.4@86.45,110.35 ; IC1.34 88.245,99.745 v1(88.4,99.9)
  Bottom Layer w0.254: v1(86.4,108.3) 86.2,108.1 86.2,105.4 87.5,104.1 87.5,100.8 v1(88.4,99.9)
RXD2: IC1.27 J8.2 | length 17.5
  Top Layer w0.254: J8.2@88.95,110.35 J8.2 88.95,106.95 92.1,103.8 95.4,103.8 97.135,102.065 IC1.27
S_REF: BOOT.2 C1.2 C2.2 C5.2 C6.2 C9.2 C11.2 C12.2 C15.2 C16.2 C18.2 C19.2 C20.2 C22.2 C23.2 C27.1 C28.2 C30.2 C31.2 C32.2 DP4.1 EN.2 IC1.1 IC1.15 IC1.38 IC1.39_1 IC1.39_2 IC1.39_3 IC1.39_4 IC1.39_5 IC1.39_6 IC1.39_7 IC1.39_8 IC1.39_9 IC1.39_10 IC1.39_11 IC1.39_12 IC1.39_13 IC1.39_14 IC1.39_15 IC1.39_16 IC1.39_17 IC1.39_18 IC1.39_19 IC1.39_20 IC1.39_21 J6.1 J7.8 J7.b1 J7.b2 J8.6 J8.b1 J8.b2 J9.6 J9.b1 J9.b2 pad.@62.9,108 pad.@114,108.3 Q.2 R9.1 R10.1 R11.1 R12.1 R15.1 R16.2 R18.1 R19.2 R20.2 R25.1 R26.2 R29.2 R31.1 U1.4 U2.4 U3.4 U4.4 U5.3 U7.1 U.5 U.9 | length 273.1
  Top Layer w0.3: v2(61.6,76.4) 61.6,76.2 61.4,76 61.4,47.2 65,43.6 66.7,43.6
  Top Layer w0.5: v2(65.8,65.4) 65.8,65.2 U3.4 ; v2(94.6,65.4) 95.198,65.4 U1.4
  Top Layer w0.8: R31.1 73.7,94.9 74.1,94.5 74.1,80.4 75.3,79.2 82.4,79.2 83.165,79.965 IC1.1 ; C12.2 103.129,70.171 103.662,69.638 103.662,65.962 v4(103.4,65.7)
  Top Layer w1: C19.2 C20.2 75.1,70.2 75.8,69.5 75.8,65.8 v2(75.4,65.4) ; C1.2 C2.2 84.729,70.171 85.3,69.6 85.3,66.1 85,65.8 v2(85,65.5) ; C5.2 C6.2 94.429,70.171 94.6,70 v2(94.6,65.4) ; C11.2 C12.2
  Bottom Layer w0.254: C9.2 R25.1 107.442,58.363 J6.1@107.569,58.236
  Bottom Layer w0.3: U5.3 65.2,41.3 v2(67.1,39.4) ; R29.2 67,93.8 67.9,94.7 67.9,98.1 65.8,100.2 62.7,100.2 61.546,99.046 61.546,76.454 v2(61.6,76.4) 65.1,76.4 67.819,79.119 R26.2 ; U.5@107.206,82.359 U.5
  Bottom Layer w1: v2(65.8,65.4) 65.9,65.5 v2(85,65.5) 94.5,65.5 v2(94.6,65.4) 94.7,65.5 v4(100.7,65.5) 101.7,65.5 101.8,65.4 ; v4(103.4,65.7) 103.1,65.4 101.8,65.4 ; J6.1@107.569,55.435 105.165,55.435 102.9,57.7 102.9,64.3 101.8,65.4
  Bottom Layer w2: J6.1@109.5,55.435 113.036,55.435 115.058,57.458 115.058,107.542 pad.@114.6,108
  other v1: 109.5,52.3 107.52,53.12 111.48,53.12 106.7,55.1 112.3,55.1 107.52,57.08 111.48,57.08 109.5,57.9 85.5,79.3 98,79.3 67.9,101.5
  other v3: 115.2,79.6 115.2,81.55 115.2,83.5 108.8,96.4 106.2,102.8 91.5,106.4 91.5,108.4 78.6,110.3 80.6,110.3 78.6,112.1 80.6,112.1
  other v4: 72.7,102.1
SCK: IC1.13 J7.7 | length 38.5
  Top Layer w0.254: v1@95.1,94.3 95.1,85.6 98.405,82.295 IC1.13 ; v1(95.1,106) 101.2,106 102.35,107.15 J7.7 J7.7@102.35,110.35
  Bottom Layer w0.254: v1(95,94.073) 95,94.4 96.4,95.8 96.4,101 95.1,102.3 v1(95.1,106)
SI1: Q6.S Q8.S R12.2 R32.2 | length 35.5
  Top Layer w0.3: v2(64.1,77.4) 64.1,76.7 62.462,75.062 62.462,50.238 v2(67,45.7)
  Bottom Layer w0.3: v2(64.1,77.4) R32.2
  other v2: 68.1,45.7 76.4,45.8 77.5,45.8 67,46.867 68.1,46.867 76.4,46.933 77.5,46.933 67,48.033 68.1,48.033 76.4,48.067 77.5,48.067 67,49.2 76.4,49.2
SI2: Q4.S Q5.S R15.2 R34.2 | length 78.3
  Top Layer w0.254: v2(66.6,97.7) 66.6,95.3 62.8,91.5 62.8,76.2 61.931,75.331 61.931,48.669 66.1,44.5 84.4,44.5 v2(85.5,45.6)
  Bottom Layer w0.254: R34.2 v2(66.6,97.7)
  other v2: 86.6,45.6 94.4,45.6 95.5,45.6 85.5,46.8 86.6,46.8 94.4,46.8 95.5,46.8 85.5,48 86.6,48 94.4,48 95.5,48 85.5,49.2 94.4,49.2
SO1: C25.1 IC1.5 R27.1 | length 29.3
  Top Layer w0.3: v2(70.5,85.6) 70.5,80.4 73.3,77.6 87.3,77.6 88.245,78.545 IC1.5
  Bottom Layer w0.5: R27.1 C25.1
SO2: C26.1 IC1.4 R30.1 | length 31.4
  Top Layer w0.3: v2(70.5,89.8) 71.3,89.8 71.6,89.5 71.6,80.2 73.6,78.2 86.5,78.2 86.975,78.675 IC1.4
  Bottom Layer w0.5: C26.1 R30.1
TEMP_SENSE: IC1.7 U5.2 | length 53.2
  Top Layer w0.3: v2(65.5,56.9) 64.2,56.9 63.016,58.084 63.016,74.616 65.4,77 70.522,77 70.526,76.996 88.096,76.996 90.785,79.685 IC1.7
  Bottom Layer w0.3: v2(65.5,56.9) 66.14,56.26 U5.2
TXD0: IC1.35 J8.5 | length 13.1
  Top Layer w0.254: v1(85.2,107.3) J8.5 J8.5@85.2,110.35 ; v1(86.7,99.9) 86.975,99.625 IC1.35
  Bottom Layer w0.254: v1(85.2,107.3) 85.4,107.1 85.4,105.4 86.9,103.9 86.9,100.1 v1(86.7,99.9)
TXD2: IC1.28 J8.3 | length 17.5
  Top Layer w0.254: J8.3@87.7,110.35 J8.3 87.7,107.2 91.7,103.2 95,103.2 95.8,102.4 95.8,98.23 IC1.28
VBUS_SENSE: C9.1 IC1.6 R24.1 R25.2 | length 54.8
  Top Layer w0.3: v2(89.5,85.2) 89.515,85.185 IC1.6
  Bottom Layer w0.254: C9.1 R25.2 R24.1
  Bottom Layer w0.3: v2(89.5,85.2) 94.5,85.2 100.5,79.2 100.5,75.6 101.6,74.5 111.4,74.5 113.654,72.246 113.654,64.154 111.042,61.542 R25.2
pads on no net: IC1.17 IC1.18 IC1.19 IC1.20 IC1.21 IC1.22 IC1.32 U.2

## Polygon pours and split planes (outlines as drawn)
S_REF on Bottom Layer "S_REF_L02_P032" (solid, remove dead copper, pour order 32): 60.4,117 116.4,117 116.4,75.2 60.4,75.2
DCBUS on Bottom Layer "Bottom Layer-No Net" (solid, remove dead copper, pour order 0): 109.5,73.4 109.5,66.5 67.8,66.5 67.8,73.4
PHC on Bottom Layer "Bottom Layer-No Net" (solid, remove dead copper, pour order 28): 78.359,56.2 81.407,56.2 81.407,52.26 81.153,52.006 81.153,31.5 78.359,31.5
PHC on Bottom Layer "Bottom Layer-No Net" (solid, pour order 4): 76.3,64.579 76.3,50 82.55,50 82.55,56.2 79,56.2 79,64.579
PHB on Bottom Layer "Bottom Layer-No Net" (solid, remove dead copper, pour order 26): 87.439,56.2 90.487,56.2 90.487,52.26 90.233,52.006 90.234,31.5 87.439,31.5
PHB on Bottom Layer "Bottom Layer-No Net" (solid, pour order 6): 85.2,64.579 85.2,49.9 91.63,49.9 91.63,56.3 87.8,56.3 87.8,64.579
SI2 on Bottom Layer "Bottom Layer-No Net" (solid, remove dead copper, pour order 20): 84.9,49.7 87.1,49.7 87.1,45 84.9,45
SI1 on Bottom Layer "Bottom Layer-No Net" (solid, remove dead copper, pour order 16): 75.819,49.7 78.1,49.7 78.1,45 75.819,45
SI1 on Bottom Layer "Bottom Layer-No Net" (solid, remove dead copper, pour order 44): 66.4,49.7 69.1,49.7 69.1,45 66.4,45
SI2 on Bottom Layer "Bottom Layer-No Net" (solid, remove dead copper, pour order 22): 93.98,49.745 96.139,49.744 96.139,46.697 96.139,45.1 93.98,45.1
PHA on Bottom Layer "Bottom Layer-No Net" (solid, pour order 8): 94.2,64.579 94.2,50 100.711,50 100.711,56.4 97,56.4 97,64.579
PHA on Bottom Layer "Bottom Layer-No Net" (solid, remove dead copper, pour order 24): 96.52,56.3 99.568,56.3 99.568,52.26 99.314,52.006 99.314,31.5 96.52,31.5
PHD on Bottom Layer "Bottom Layer-No Net" (solid, pour order 36): 67.017,64.579 67.017,50 73.567,50 73.567,56.3 70.017,56.3 70.017,64.579
PHD on Bottom Layer "Bottom Layer-No Net" (solid, remove dead copper, pour order 38): 69.376,56.2 72.424,56.2 72.424,52.26 72.17,52.006 72.17,31.5 69.376,31.5
S_REF on Top Layer "S_REF_L01_P034" (solid, remove dead copper, pour order 34): 60.4,117 116.4,117 116.4,78.6 60.4,78.6
SI1 on Top Layer "Bottom Layer-No Net" (solid, remove dead copper, pour order 40): 66.4,49.9 78.2,49.9 78.2,45 66.4,45
SI2 on Top Layer "Bottom Layer-No Net" (solid, remove dead copper, pour order 42): 84.9,50 96.5,50 96.5,45 84.9,45
S_REF on Top Layer "Bottom Layer-No Net" (solid, remove dead copper, pour order 18): 107.7,44 107.7,36.5 66.4,36.5 66.4,44
S_REF on Top Layer "Bottom Layer-No Net" (solid, remove dead copper, pour order 30): 105.8,55.5 113.2,55.5 113.2,36.5 105.8,36.5
no net on Bottom Solder "Bottom Layer-No Net" (solid): 94.85,55.25 94.85,64.55 96.1,64.55 96.1,55.25
no net on Bottom Solder "Bottom Layer-No Net" (solid): 85.825,55.3 85.825,64.475 87.075,64.475 87.075,55.3
no net on Bottom Solder "Bottom Layer-No Net" (solid): 76.8,55.2 76.8,64.575 78.025,64.575 78.025,55.2
no net on Bottom Solder "Bottom Layer-No Net" (solid): 67.775,55.25 67.775,64.575 69,64.575 69,55.25
no net on Bottom Solder "Bottom Layer-No Net" (solid): 69.6,68.5 69.6,71.2 106.9,71.2 106.9,68.5
no net on Bottom Solder "Bottom Layer-No Net" (solid): 97.1,37.1 97.1,50.1 98.6,50.1 98.6,37.1
no net on Bottom Solder "Bottom Layer-No Net" (solid): 88.063,37.1 88.063,50.1 89.563,50.1 89.563,37.1
no net on Bottom Solder "Bottom Layer-No Net" (solid): 78.983,37.1 78.983,50.1 80.483,50.1 80.483,37.1
PHD on Bottom Solder "Bottom Layer-No Net" (solid): 70,37.1 70,50.1 71.5,50.1 71.5,37.1
no net on Top Solder "Bottom Layer-No Net" (solid): 71,41.6 71,39 85.3,39 85.3,41.6
no net on Top Solder "Bottom Layer-No Net" (solid): 108.3,53.442 110.9,53.453 110.9,39 90.2,39 90.2,41.6 108.3,41.6

## Other copper
Top Layer:
  pour cut-out: 60.4,75.2 60.4,100.8 75.5,100.8 75.5,75.2
Bottom Layer:
  pour cut-out: 109.5,73.481 105.034,74.1 109.5,74.1
  pour cut-out: 60.4,75.4 60.4,101 75,101 75,75.4

## Silkscreen, mask and mechanical layers (free items; w line width, h text height)
Mechanical 1:
  the board outline again, w0.3

## Text inside footprints (layer, text, board x,y; h text height)
IC1: Mechanical 13 "ANTENNA" at 79.425,83.665 h1.78 r90